# Altium PCB USB_CPLD.PcbDoc
Units mm, origin at the board's own origin, x right, y up, seen from the top; angles counter-clockwise.
Board outline 91.19 x 83.31 mm, 2 copper layers (Top Layer, Bottom Layer); 57 components, 142 nets, 491 pads, 153 vias.
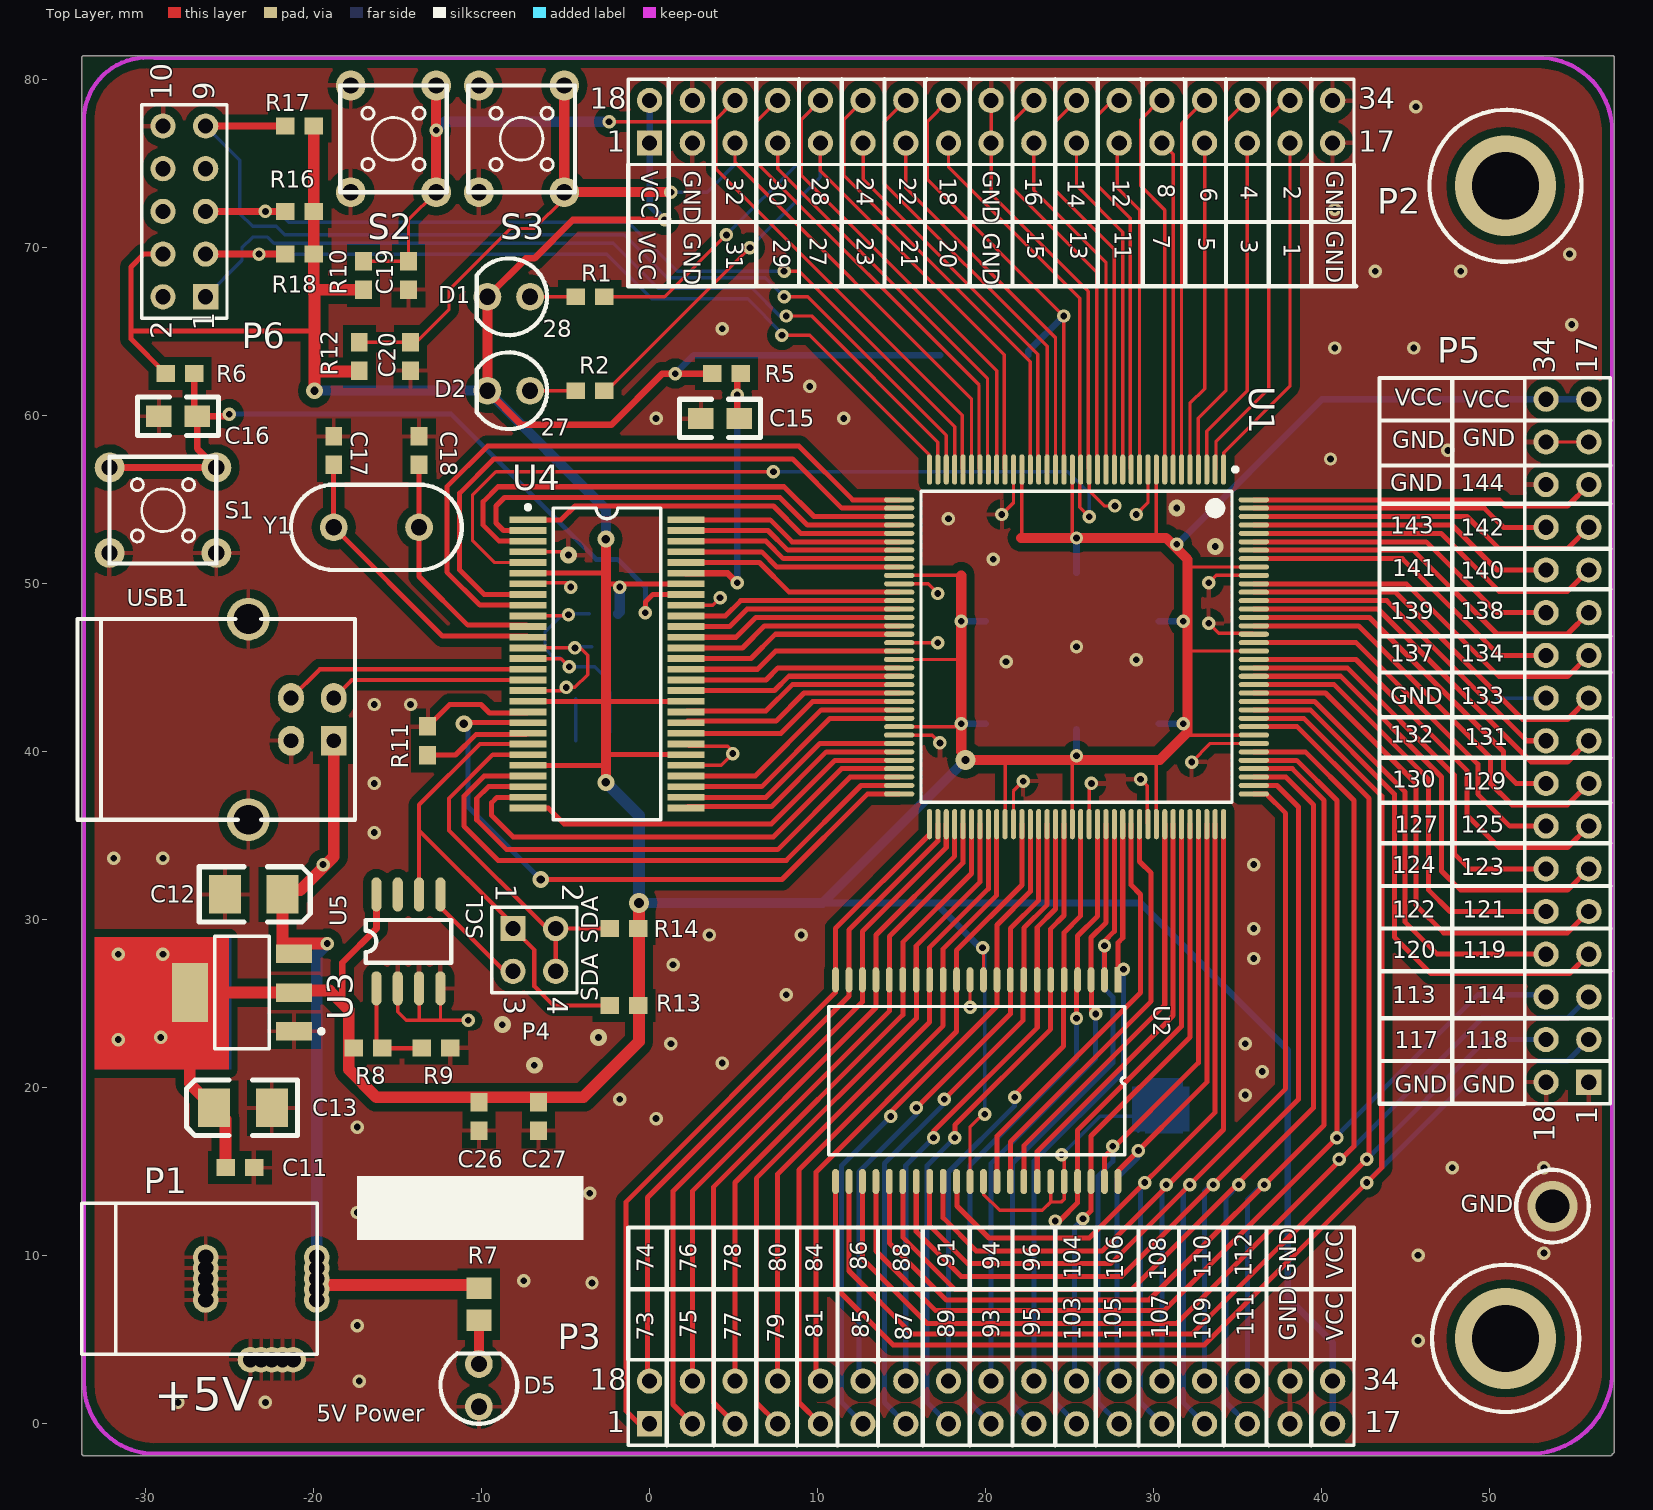
[diagram p0: Top Layer view]
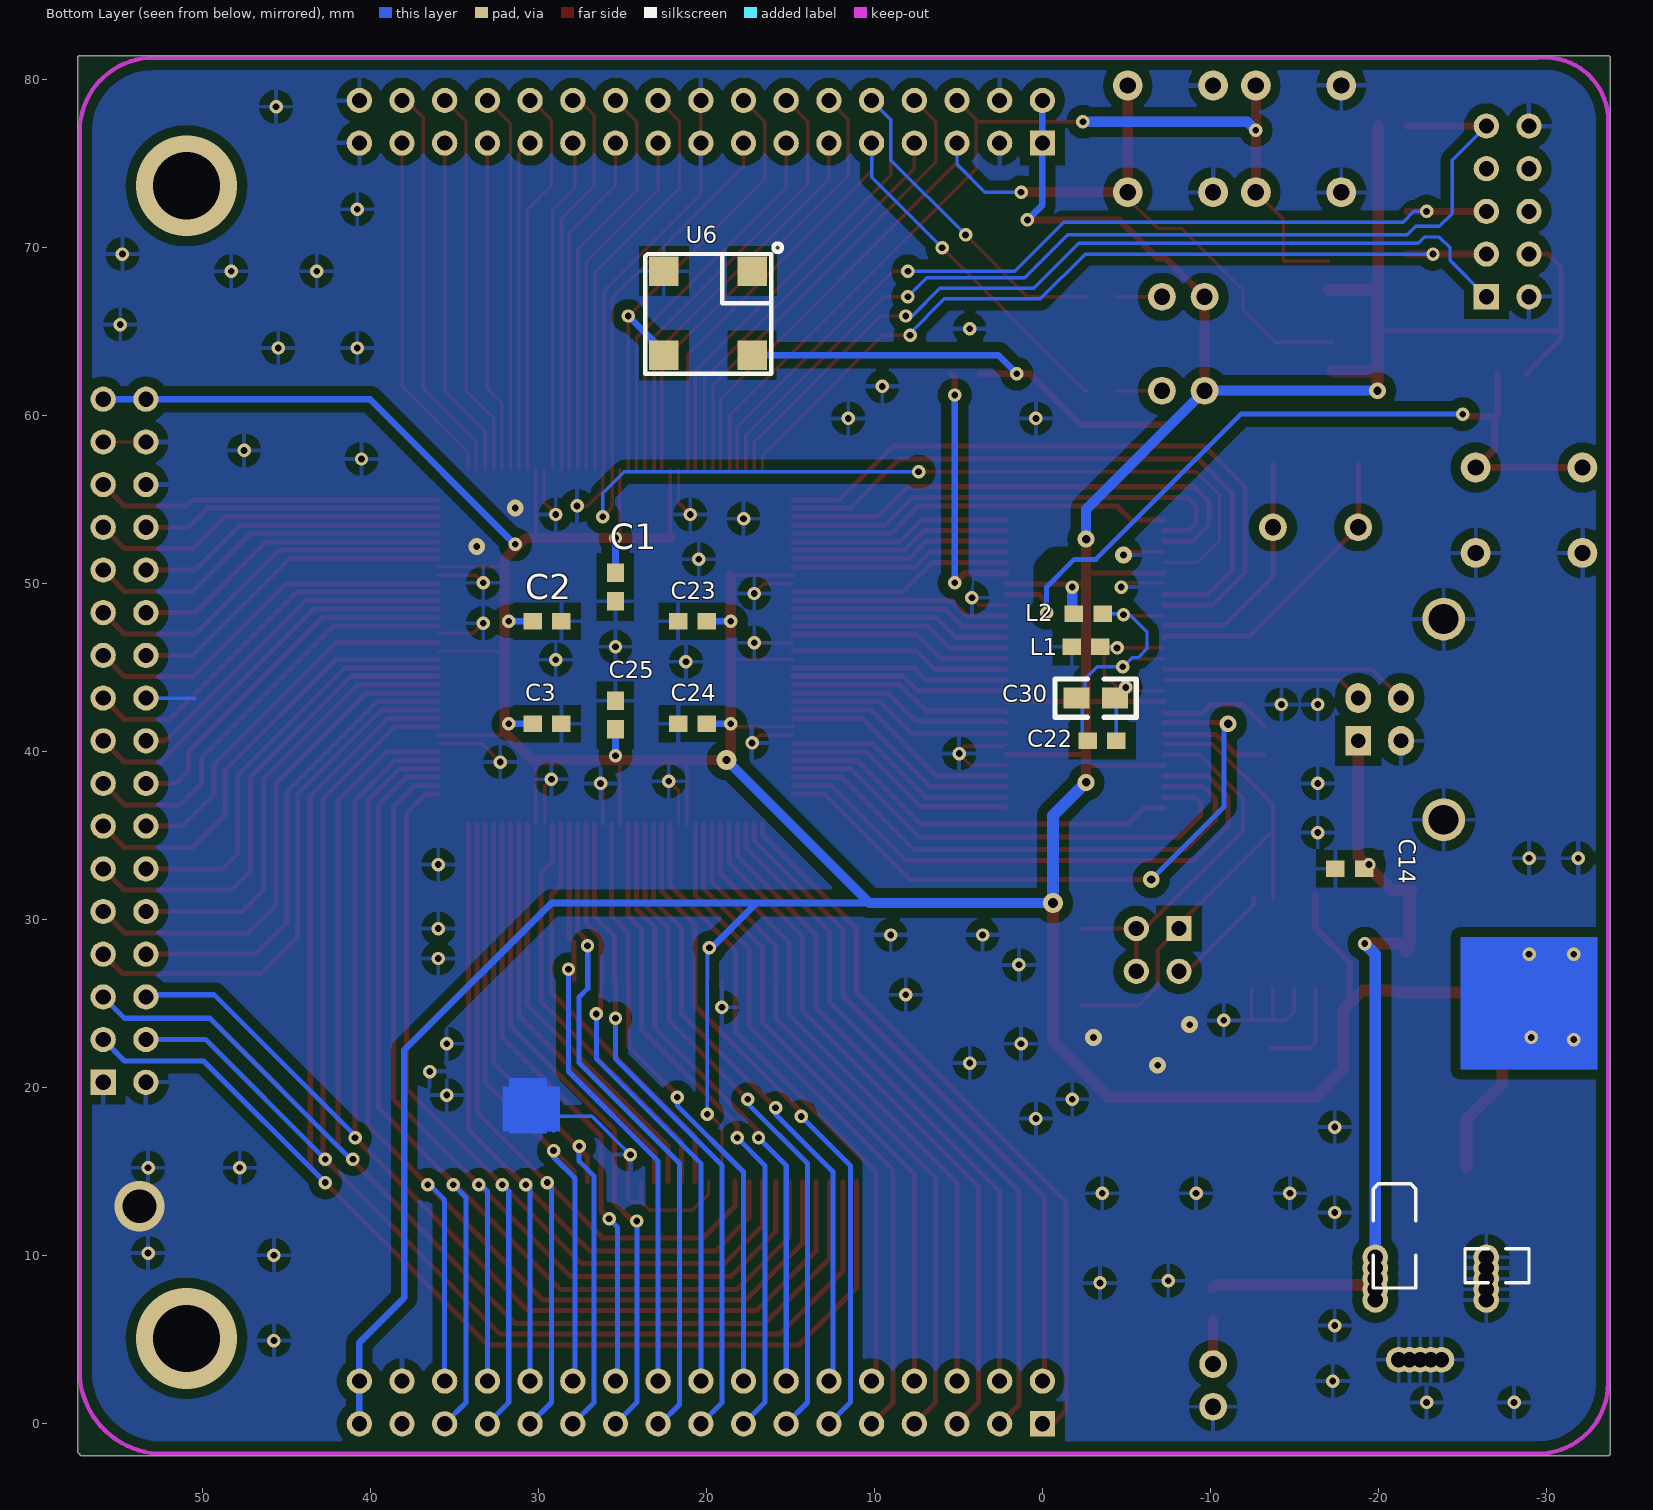
[diagram p1: Bottom Layer view, seen from below]

## Layer stack, top to bottom
Top Layer: signal copper 0.0356
Dielectric: dielectric 0.32, FR-4, Dk 4.8
Bottom Layer: signal copper 0.0356

## Board outline
-33.782,-1.778 ccw(c-33.655,-1.778) -33.655,-1.905 57.15,-1.905 ccw(c57.15,-1.778) 57.277,-1.778 ccw(c57.277,-1.651) 57.404,-1.651 57.404,81.28 ccw(c57.277,81.28) 57.277,81.407 -33.655,81.407 ccw(c-33.655,81.28) -33.782,81.28

## Design rules (kind name [scope] priority, off if disabled: settings)
Clearance [All] p1: gap=0.2
ComponentClearance [All] p1: gap=0.254 collisioncheckmode=3 verticalgap=0.254
PolygonConnect [All] p1: connectstyle=Relief reliefconductorwidth=0.254 reliefentries=4 polygonreliefangle="90 Angle"
RoutingVias [All] p1: holewidth=0.711 width=1.27 viastyle="Through Hole" minholewidth=0.711 minwidth=1.27 maxholewidth=0.711 maxwidth=1.27
SolderMaskExpansion [All] p1: expansion=0.102
TestPointUsage [All] p1: valid=0 allowmultiple=FALSE
Testpoint [All] p1: side=15 testpointundercomponent=TRUE minsize=1.016 maxsize=2.54 preferedsize=1.524 minholesize=0 maxholesize=1.016 preferedholesize=0.813 testpointgrid=0.025 style=1023 order=0-112345678
Width [All] p1: maxlimit=0.7 minlimit=0.2 preferedwidth=0.254
18 further rules are at their usual default settings.

## Components (designator, comment, footprint, x,y, rotation, side; value= is the part's Value field where it differs from the comment)
C1 "0.1uF" 1608[0603] 25.4,49.784 r90 bottom
C2 "0.1uF" 1608[0603] 29.464,47.752 r0 bottom
C3 "Cap Semi" 1608[0603] 29.464,41.656 r0 bottom
C11 "0.1uF" 1608[0603] -24.384,15.24 r0 top
C12 "22uF" 3528 -21.844,31.496 r0 top
C13 "22uF" 3528 -25.908,18.796 r180 top
C14 "0.1uF" 1608[0603] -18.288,33.02 r0 bottom
C15 "0.1uF" 0805 5.334,59.817 r180 top
C16 "0.1uF" 0805 -26.924,59.944 r180 top
C17 "Cap" 1608[0603] -18.796,57.912 r90 top
C18 "Cap" 1608[0603] -13.716,57.912 r90 top
C19 "104" 1608[0603] -14.351,68.326 r270 top
C20 "104" 1608[0603] -14.224,63.5 r270 top
C22 "0.1uF" 1608[0603] -3.556,40.64 r180 bottom
C23 "Cap Semi" 1608[0603] 20.828,47.752 r180 bottom
C24 "Cap Semi" 1608[0603] 20.828,41.656 r180 bottom
C25 "Cap Semi" 1608[0603] 25.4,42.164 r270 bottom
C26 "Cap Semi" 1608[0603] -10.16,18.288 r90 top
C27 "Cap Semi" 1608[0603] -6.604,18.288 r90 top
C30 "10uF" 0805 -2.032,43.18 r180 bottom
D1 "LED" LED-3 -7.112,67.056 r180 top
D2 "LED" LED-3 -7.112,61.468 r180 top
D5 "LED" LED-3 -10.16,1.016 r90 top
L1 "10uH" 1608[0603] -2.73,48.197 r180 bottom (schematic designator Ind1)
L2 "10uH" 1608[0603] -2.603,46.228 r180 bottom (schematic designator Ind2)
P1 "POWER" POWER_BIG -19.812,8.636 r90 top
P2 "Header 17X2A" HDR2X17_CEN 0,76.2 r0 top
P3 "Header 17X2A" HDR2X17_CEN 0,0 r0 top
P4 "Header 2X2" HDR2X2 -8.128,29.464 r270 top
P5 "Header 17X2A" HDR2X17_CEN 55.88,20.32 r90 top
P6 "JTAG" HDR2X5 -26.416,67.056 r90 top
R1 "Res1" 1608[0603] -3.556,67.056 r0 top
R2 "Res1" 1608[0603] -3.556,61.468 r0 top
R5 "10K" 1608[0603] 4.572,62.484 r180 top
R6 "10K" 1608[0603] -27.94,62.484 r180 top
R7 "1K" 2012[0805] -10.16,7.112 r90 top
R8 "0" 1608[0603] -16.764,22.352 r180 top
R9 "0" 1608[0603] -12.7,22.352 r0 top
R10 "10K" 1608[0603] -17.018,68.326 r270 top
R11 "Res3" 1608[0603] -13.208,40.64 r90 top
R12 "10K" 1608[0603] -17.272,63.5 r270 top
R13 "2K2" 1608[0603] -1.524,24.892 r180 top
R14 "2K2" 1608[0603] -1.524,29.464 r180 top
R16 "300" 1608[0603] -20.828,72.136 r0 top
R17 "300" 1608[0603] -20.828,77.216 r0 top
R18 "300" 1608[0603] -20.828,69.596 r0 top
S1 "SW-PB" SW-6-6 -28.956,54.356 r90 top
S2 "SW-PB" SW-6-6 -15.24,76.454 r180 top
S3 "SW-PB" SW-6-6 -7.62,76.454 r180 top
U1 "EPM1270T144C5N" TQFP144_N 25.4,46.228 r270 top
U2 "ISSI61LV25616-10T" TSOPII44 27.864,26.416 r270 top
U3 "ASM1117-3.3" SOT223 -24.257,25.654 r90 top
U4 "CY7C68013A-56PVXC" O56 -2.54,45.212 r270 top
U5 "24LC64" SO-8 -16.256,25.908 r90 top
U6 "50MHZ" OSC_50MHZ 17.272,68.58 r0 bottom
USB1 "USB_B" USB-SQUARE -18.796,40.64 r180 top
Y1 "24MHZ" XTAL -16.256,53.34 r0 top

## Footprints (in the part's own frame and the unit in brackets; to place one, negate y for a bottom-side part, rotate by r counter-clockwise, add the part's x,y. Pads: shape width x height; smd on the part's side, far side on the other; paste and mask are expansions set on the pad)
0805 [mil]
  rect 60x50 smd: 1(0,0) 2(90,0)
  silkscreen extent -50,-45 140,45
1608[0603] [mm] "Chip Capacitor; Body 1.6 x 0.8 mm (LxW typ)"
  rect 1.1x1 smd: 1(-0.85,0) 2(0.85,0)
2012[0805] [mm] "Chip Resistor; Body 2.0 x 1.3 mm (LxW typ)"
  rect 1.3x1.5 smd: 1(-0.95,0) 2(0.95,0)
3528 [mil]
  rect 75x90 smd: 1(0,0) 2(-135,0)
  silkscreen extent -195,-65 65,65
HDR2X2 [mm] "Connector; Header; 2x2 Position"
  rect 1.5x1.5 hole 0.9: 1(0,0)
  round 1.5 hole 0.9: 2(0,2.54) 3(2.54,0) 4(2.54,2.54)
  silkscreen extent -1.27,-1.27 3.81,3.81
HDR2X5 [mm] "Connector; Header; 5x2 Position"
  rect 1.5x1.5 hole 0.9: 1(0,0)
  round 1.5 hole 0.9: 2(0,2.54) 3(2.54,0) 4(2.54,2.54) 5(5.08,0) 6(5.08,2.54) 7(7.62,0) 8(7.62,2.54) 9(10.16,0) 10(10.16,2.54)
  silkscreen extent -1.27,-1.27 11.43,3.81
HDR2X17_CEN [mm] "Connector; Header; 17x2 Position"
  rect 1.5x1.5 hole 0.9: 1(0,0)
  round 1.5 hole 0.9: 2(2.54,0) 3(5.08,0) 4(7.62,0) 5(10.16,0) 6(12.7,0) 7(15.24,0) 8(17.78,0) 9(20.32,0) 10(22.86,0) 11(25.4,0) 12(27.94,0) 13(30.48,0) 14(33.02,0) 15(35.56,0) 16(38.1,0) 17(40.64,0) 18(0,2.54) 19(2.54,2.54) 20(5.08,2.54) 21(7.62,2.54) 22(10.16,2.54) 23(12.7,2.54) 24(15.24,2.54) 25(17.78,2.54) 26(20.32,2.54) 27(22.86,2.54) 28(25.4,2.54) 29(27.94,2.54) 30(30.48,2.54) 31(33.02,2.54) 32(35.56,2.54) 33(38.1,2.54) 34(40.64,2.54)
  silkscreen extent -1.27,-1.27 41.91,3.81
LED-3 [mil]
  round 65 hole 38: 1(0,0) 2(100,0)
  silkscreen extent -40,-90 125,90
O56 [mm] "SSOP; 56 Leads; Body Width 7.5 mm; Pitch 0.635 mm"
  rect 0.4x2.2 smd: 1(-8.572,-4.7) 2(-7.937,-4.7) 3(-7.302,-4.7) 4(-6.667,-4.7) 5(-6.032,-4.7) 6(-5.397,-4.7) 7(-4.762,-4.7) 8(-4.127,-4.7) 9(-3.492,-4.7) 10(-2.857,-4.7) 11(-2.222,-4.7) 12(-1.587,-4.7) 13(-0.952,-4.7) 14(-0.317,-4.7) 15(0.318,-4.7) 16(0.953,-4.7) 17(1.588,-4.7) 18(2.223,-4.7) 19(2.858,-4.7) 20(3.493,-4.7) 21(4.128,-4.7) 22(4.763,-4.7) 23(5.398,-4.7) 24(6.033,-4.7) 25(6.668,-4.7) 26(7.303,-4.7) 27(7.938,-4.7) 28(8.573,-4.7) 29(8.572,4.7) 30(7.937,4.7) 31(7.302,4.7) 32(6.667,4.7) 33(6.032,4.7) 34(5.397,4.7) 35(4.762,4.7) 36(4.127,4.7) 37(3.492,4.7) 38(2.857,4.7) 39(2.222,4.7) 40(1.587,4.7) 41(0.952,4.7) 42(0.317,4.7) 43(-0.318,4.7) 44(-0.953,4.7) 45(-1.588,4.7) 46(-2.223,4.7) 47(-2.858,4.7) 48(-3.493,4.7) 49(-4.128,4.7) 50(-4.763,4.7) 51(-5.398,4.7) 52(-6.033,4.7) 53(-6.668,4.7) 54(-7.303,4.7) 55(-7.938,4.7) 56(-8.573,4.7)
  silkscreen extent -9.45,-4.82 9.28,3.2
OSC_50MHZ [mm]
  rect 1.75x1.75 smd: 1(0,0) 2(5.25,0) 3(5.25,5) 4(0,5)
  silkscreen extent -1.78,-1.65 6.35,6.1
POWER_BIG [mil]
  round 60 hole 36: 1(-50,0) 1(-25,0) 1(0,0) 1(25,0) 1(50,0) 2(-50,260) 2(-25,260) 2(0,260) 2(25,260) 2(50,260) 3(-190,55) 3(-190,80) 3(-190,105) 3(-190,130) 3(-190,155)
  silkscreen extent -177,-1 177,550
SO-8 [mil]
  oval 80x24 smd: 1(0,0) 2(0,-50) 3(0,-100) 4(0,-150) 5(220,-150) 6(220,-100) 7(220,-50) 8(220,0)
  silkscreen extent 60,-175 160,25
SOT223 [mm] "SOT-223/SC-73; 4 Leads; Body 6.7 x 7.3 mm, inc. leads (LxW max)"
  rect 1.1x2.15 smd: 1(-2.3,-3.1) 2(0,-3.1) 3(2.3,-3.1)
  rect 3.5x2.15 smd: 4(0,3.1)
  silkscreen extent -3.35,-4.85 3.35,1.63
SW-6-6 [mil]
  round 70 hole 38: 1(-100,125) 1(-100,-125) 2(100,125) 2(100,-125)
  silkscreen extent -125,-125 125,125
TQFP144_N [mm] "Thin QFP, 144-Leads, Body 20x20mm, Pitch 0.5mm, IPC Medium Density"
  oval 1.8x0.3 smd: 1(-10.55,8.75) 2(-10.55,8.25) 3(-10.55,7.75) 4(-10.55,7.25) 5(-10.55,6.75) 6(-10.55,6.25) 7(-10.55,5.75) 8(-10.55,5.25) 9(-10.55,4.75) 10(-10.55,4.25) 11(-10.55,3.75) 12(-10.55,3.25) 13(-10.55,2.75) 14(-10.55,2.25) 15(-10.55,1.75) 16(-10.55,1.25) 17(-10.55,0.75) 18(-10.55,0.25) 19(-10.55,-0.25) 20(-10.55,-0.75) 21(-10.55,-1.25) 22(-10.55,-1.75) 23(-10.55,-2.25) 24(-10.55,-2.75) 25(-10.55,-3.25) 26(-10.55,-3.75) 27(-10.55,-4.25) 28(-10.55,-4.75) 29(-10.55,-5.25) 30(-10.55,-5.75) 31(-10.55,-6.25) 32(-10.55,-6.75) 33(-10.55,-7.25) 34(-10.55,-7.75) 35(-10.55,-8.25) 36(-10.55,-8.75) 73(10.55,-8.75) 74(10.55,-8.25) 75(10.55,-7.75) 76(10.55,-7.25) 77(10.55,-6.75) 78(10.55,-6.25) 79(10.55,-5.75) 80(10.55,-5.25) 81(10.55,-4.75) 82(10.55,-4.25) 83(10.55,-3.75) 84(10.55,-3.25) 85(10.55,-2.75) 86(10.55,-2.25) 87(10.55,-1.75) 88(10.55,-1.25) 89(10.55,-0.75) 90(10.55,-0.25) 91(10.55,0.25) 92(10.55,0.75) 93(10.55,1.25) 94(10.55,1.75) 95(10.55,2.25) 96(10.55,2.75) 97(10.55,3.25) 98(10.55,3.75) 99(10.55,4.25) 100(10.55,4.75) 101(10.55,5.25) 102(10.55,5.75) 103(10.55,6.25) 104(10.55,6.75) 105(10.55,7.25) 106(10.55,7.75) 107(10.55,8.25) 108(10.55,8.75)
  oval 0.3x1.8 smd: 37(-8.75,-10.55) 38(-8.25,-10.55) 39(-7.75,-10.55) 40(-7.25,-10.55) 41(-6.75,-10.55) 42(-6.25,-10.55) 43(-5.75,-10.55) 44(-5.25,-10.55) 45(-4.75,-10.55) 46(-4.25,-10.55) 47(-3.75,-10.55) 48(-3.25,-10.55) 49(-2.75,-10.55) 50(-2.25,-10.55) 51(-1.75,-10.55) 52(-1.25,-10.55) 53(-0.75,-10.55) 54(-0.25,-10.55) 55(0.25,-10.55) 56(0.75,-10.55) 57(1.25,-10.55) 58(1.75,-10.55) 59(2.25,-10.55) 60(2.75,-10.55) 61(3.25,-10.55) 62(3.75,-10.55) 63(4.25,-10.55) 64(4.75,-10.55) 65(5.25,-10.55) 66(5.75,-10.55) 67(6.25,-10.55) 68(6.75,-10.55) 69(7.25,-10.55) 70(7.75,-10.55) 71(8.25,-10.55) 72(8.75,-10.55) 109(8.75,10.55) 110(8.25,10.55) 111(7.75,10.55) 112(7.25,10.55) 113(6.75,10.55) 114(6.25,10.55) 115(5.75,10.55) 116(5.25,10.55) 117(4.75,10.55) 118(4.25,10.55) 119(3.75,10.55) 120(3.25,10.55) 121(2.75,10.55) 122(2.25,10.55) 123(1.75,10.55) 124(1.25,10.55) 125(0.75,10.55) 126(0.25,10.55) 127(-0.25,10.55) 128(-0.75,10.55) 129(-1.25,10.55) 130(-1.75,10.55) 131(-2.25,10.55) 132(-2.75,10.55) 133(-3.25,10.55) 134(-3.75,10.55) 135(-4.25,10.55) 136(-4.75,10.55) 137(-5.25,10.55) 138(-5.75,10.55) 139(-6.25,10.55) 140(-6.75,10.55) 141(-7.25,10.55) 142(-7.75,10.55) 143(-8.25,10.55) 144(-8.75,10.55)
  silkscreen extent -10.67,-9.25 9.25,9.58, body extent -10,-10 10,10, height 1.6
TSOPII44 [mm]
  rect 1.5x0.4 smd: 1(0,0)
  oval 1.5x0.4 smd: 2(0,-0.8) 3(0,-1.6) 4(0,-2.4) 5(0,-3.2) 6(0,-4) 7(0,-4.8) 8(0,-5.6) 9(0,-6.4) 10(0,-7.2) 11(0,-8) 12(0,-8.8) 13(0,-9.6) 14(0,-10.4) 15(0,-11.2) 16(0,-12) 17(0,-12.8) 18(0,-13.6) 19(0,-14.4) 20(0,-15.2) 21(0,-16) 22(0,-16.8) 23(12,-16.8) 24(12,-16) 25(12,-15.2) 26(12,-14.4) 27(12,-13.6) 28(12,-12.8) 29(12,-12) 30(12,-11.2) 31(12,-10.4) 32(12,-9.6) 33(12,-8.8) 34(12,-8) 35(12,-7.2) 36(12,-6.4) 37(12,-5.6) 38(12,-4.8) 39(12,-4) 40(12,-3.2) 41(12,-2.4) 42(12,-1.6) 43(12,-0.8) 44(12,0)
  silkscreen extent 1.58,-17.2 10.42,0.4
USB-SQUARE [mil]
  round 100 hole 70: 0(200,185) 0(200,-285)
  rect 60x70 hole 35: 1(0,0)
  oval 60x70 hole 35: 2(0,-100) 3(100,-100) 4(100,0)
  silkscreen extent -50,-285 600,185
XTAL [mil]
  round 65 hole 38: 1(-100,0) 2(100,0)
  silkscreen extent -200,-100 200,100

## Part data
C1 C2 C19 C20: library part "Cap Semi", "Capacitor (Semiconductor SIM Model)"
C3 C23 C24 C25 C26 C27: "Capacitor (Semiconductor SIM Model)"
C11 C14 C22: library part CAP, "Capacitor"
C12 C13 C30: library part ELECTRO1, "Electrolytic Capacitor"
C15 C16: library part Cap2, "Capacitor"
C17 C18: "Capacitor"
D1 D2 D5: library part LED3, "Typical BLUE SiC LED"
L1 L2: library part RES1
P2 P3 P5: "Header, 17-Pin, Dual row"
P4: "Header, 2-Pin, Dual row"
P6: library part "Header 5X2", "Header, 5-Pin, Dual row"
R1 R2 R11: "Resistor"
R5 R6 R10 R12: library part Res1, "Resistor"
R7 R13 R14: library part RES2
R8 R9 R16 R17 R18: library part Res2, "Resistor"
S1 S2 S3: "Switch"
U1: "MAX II 3.3/2.5V CPLD, 116 IOs, 1,270 Logic Elements, 144-Pin Plastic TQFP, Commercial Temperature, Speed Grade 5, Pb-Free"
U2: library part IS61LV25616-10T, "IS61LV25616-10T  10ns Speed"
U3: library part LM317MAT(3), "Three-Terminal Adjustable Output Positive Voltage Regulator"
U4: "EZ-USB FX2LP USB Microcontroller Ideal for Non-Battery Powered Applications,16K RAM, 24 I/Os, 56-Pin SSOP, Pb-Free, Commercial Grade"
U5: library part 24LC00
U6: library part OSC50MHZ
Y1: library part XTAL, "Crystal Oscillator"

## Via types
v1: diameter 0.8, hole 0.4, Top Layer to Bottom Layer, 137 vias
v2: diameter 1, hole 0.4, Top Layer to Bottom Layer, 6 vias
v3: diameter 1, hole 0.5, Top Layer to Bottom Layer, 5 vias
v4: diameter 6, hole 4, Top Layer to Bottom Layer, 2 vias
v5: diameter 1.2, hole 0.5, Top Layer to Bottom Layer, 1 vias
v6: diameter 1.2, hole 0.6, Top Layer to Bottom Layer, 1 vias
v7: diameter 3, hole 2, Top Layer to Bottom Layer, 1 vias

## Nets (pads, with @x,y where several pads share a name; then routed paths per layer and width w, separated by ;. In a path a pad name is that pad's centre, name@x,y a point inside that pad or via, vN(x,y) a via of type N, cw(c..) or ccw(c..) an arc to the next point about the centre after c; other vN are vias at no path point)
AUSBGND: C22.2 C30.2 L2.2 U4.13 U4.17 | length 12.4
  Top Layer w0.2: U4.17 -5.143,43.624 v1(-4.953,43.815) -4.445,43.815 -3.683,44.577 -3.683,45.72 -4.127,46.164 U4.13
  Bottom Layer w0.2: v1(-4.445,46.164) -4.381,46.228 L2.2 ; C22.2 C30.2@-4.406,43.141
AVCC3.3: C22.1 C30.1 L1.2 U4.10 U4.14 | length 16.9
  Top Layer w0.2: U4.14 -5.271,45.529 v1(-4.779,45.038) ; U4.10 -4.889,48.069 v1(-4.826,48.133)
  Bottom Layer w0.2: L1.2 -4.763,48.197 v1(-4.826,48.133) -5.207,48.133 -6.223,47.117 -6.223,46.101 -5.715,45.593 -5.334,45.593 v1(-4.779,45.038) -3.255,45.038 -2.54,44.323 -2.54,43.688 -2.374,43.522 -2.374,41.148
CLK_OUT: P2.8 U1.18 U4.5 | length 71.5
  Top Layer w0.2: U4.5 -9.207,51.244 -10.541,52.578 -10.541,55.245 -9.144,56.642 v1(7.366,56.642) ; P2.8 17.78,74.803 25.6,66.983 25.6,54.537 v1(26.162,53.975) ; U1.18@25.6,56.828 U1.18
  Bottom Layer w0.2: v1(7.366,56.642) 24.892,56.642 26.162,55.372 v1(26.162,53.975)
CPLD_CLK: P2.25 U1.20 U6.3 | length 29.1
  Top Layer w0.2: P2.25 16.51,77.47 16.51,74.041 24.65,65.901 U1.20
  Bottom Layer w0.4: U6.3 22.522,63.797 v1(24.638,65.913)
CTL0: U1.61 U4.36 | length 13.5
  Top Layer w0.3: U4.36 7.81,41.084 9.704,42.978 U1.61
CTL1: U1.60 U4.37 | length 13.4
  Top Layer w0.3: U4.37 2.245,41.805 7.515,41.805 9.188,43.478 U1.60
CTL2: U1.59 U4.38 | length 13.4
  Top Layer w0.3: U4.38 2.224,42.418 6.93,42.418 8.49,43.978 U1.59
DGND: C1.1 C2.1 C3.1 C11.2 C12.2 C13.2 C14.2 C15.2 C16.2 C17.2 C18.2 C19.2 C20.2 C23.1 C24.1 C25.1 C26.1 C27.1 D5.1 L2.1 P1.2 P1.3 P2.2 P2.9 P2.17 P2.19 P2.26 P2.34 P3.16 P3.33 P5.1 P5.16 P5.18 P5.27 P5.32 P5.33 P6.2 P6.10 R9.2 R11.2 S1.1 S2.2 S3.2 U1.10 U1.17 U1.26 U1.47 U1.54 U1.65 U1.83 U1.92 U1.99 U1.115 U1.128 U1.135 U2.12 U2.34 U2.39 U2.40 U3.1 U4.4 U4.7 U4.19 U4.33 U4.35 U4.48 U5.2 U5.3 U5.4 U6.2 USB1.0 USB1.4 | length 116.3
  Top Layer w0.2: U5.2 -14.986,24.511 -14.478,24.003 v1@-10.541,24.003 ; -13.716,24.003 U5.3 ; -12.446,24.003 U5.4 ; U4.7 -7.177,50.038 -4.953,50.038 v1(-4.699,49.784) ; U4.4 v2@-5.016,51.88 ; U4.33 4.255,39.179 v1(4.953,39.878) 4.953,40.005 4.644,40.314 2.295,40.314 U4.35 ; U4.48 3.746,48.704 v1(4.191,49.149) ; U1.65 16.807,40.978 v1(17.272,40.513) ; U1.54 v1(17.141,46.478) ; U1.47 16.57,49.978 v1(17.145,49.403) ; v1(19.064,24.779) U2.12 ; U2.34 19.864,13.664 20.828,12.7 23.368,12.7 23.864,13.196 ; P2.26 20.32,73.152 26.1,67.372 26.1,56.828 U1.17 26.15,55.511 27.051,54.61 v1(27.686,54.61) ; v1(20.955,54.102) 21.65,54.797 U1.26 ; U1.83 21.65,37.652 v1(22.225,38.227) ; U2.39 23.864,13.196 ; v1(24.511,16.002) 24.664,15.849 24.664,13.361 24.499,13.196 23.864,13.196 ; U1.92 26.15,37.961 v1(26.289,38.1) ; v1(28.956,54.102) 29.65,54.796 U1.10 ; v1(29.21,38.354) 29.6,37.964 29.6,35.728 U1.99 ; v1(32.258,39.37) 33.366,40.478 U1.115 ; v1(33.274,47.625) 33.871,47.028 35.9,47.028 U1.128 ; v1(33.274,50.038) 33.714,50.478 U1.135 ; P5.33 P5.16
  Top Layer w0.3: R11.2 -11.899,42.799 -10.033,42.799 -9.525,42.291 -7.304,42.291 U4.19
  Bottom Layer w0.2: v1(24.511,16.002) 26.797,18.288 30.861,18.288 ; 29.083,17.399 29.083,18.669 29.845,19.431 30.353,19.431 ; 50.419,43.18 P5.27
  other v1: -28.067,1.27 -22.86,1.27 -17.272,2.54 45.72,4.953 -17.399,5.842 -3.429,8.382 -7.493,8.509 45.72,10.033 53.213,10.16 -17.399,12.573 -14.732,13.716 -9.144,13.716 -3.556,13.716 47.752,15.24 53.213,15.24 -17.399,17.653 0.381,18.161 -1.778,19.304 35.433,19.558 36.449,20.955 4.318,21.463 1.27,22.606 35.433,22.606 -10.795,24.003 8.128,25.527 1.397,27.305 35.941,27.686 3.556,29.083 9.017,29.083 35.941,29.464 35.941,33.274 -31.877,33.655 -28.956,33.655 -16.383,35.179 -16.383,38.1 -16.383,42.799 -14.224,42.799 21.209,45.339 28.956,45.466 25.4,46.228 20.447,51.435 17.78,53.848 40.513,57.404 47.498,57.912 0.381,59.817 11.557,59.817 9.525,61.722 40.767,64.008 45.466,64.008 4.318,65.151 54.864,65.405 43.18,68.58 48.26,68.58 54.737,69.596 40.767,72.263 45.593,78.359
  other v2: -6.858,21.336 -3.048,22.987 -8.763,23.749 -4.826,51.689 33.655,52.197 31.369,54.483
  other v7: 53.721,12.954
G_TCK: P6.1 U1.35 | length 52.2
  Top Layer w0.2: v1(8.128,65.913) 9.652,65.913 17.15,58.415 U1.35
  Bottom Layer w0.2: P6.1 -24.257,69.215 -24.257,69.977 -23.622,70.612 -22.733,70.612 -22.352,70.231 -2.159,70.231 0.508,67.564 6.096,67.564 7.747,65.913 v1(8.128,65.913)
G_TDI: P6.9 R17.1 U1.34 | length 60.3
  Top Layer w0.2: v1(8.001,67.056) 9.398,67.056 17.65,58.804 U1.34
  Top Layer w0.4: P6.9 R17.1
  Bottom Layer w0.2: P6.9 -24.384,75.184 -24.384,72.009 -23.622,71.247 -22.225,71.247 -21.717,70.739 -1.524,70.739 1.035,68.18 6.877,68.18 v1(8.001,67.056)
G_TDO: P6.3 R18.1 U1.36 | length 50.3
  Top Layer w0.2: v1@8.128,64.77 9.525,64.77 16.65,57.645 U1.36
  Top Layer w0.4: P6.3 R18.1
  Bottom Layer w0.2: v1(-23.241,69.596) -2.54,69.596 0.127,66.929 5.842,66.929 7.874,64.897 v1(7.874,64.77)
G_TMS: P6.5 R16.1 U1.33 | length 53.6
  Top Layer w0.2: v1(8.001,68.58) 8.89,68.58 18.15,59.32 U1.33
  Top Layer w0.4: P6.5 R16.1
  Bottom Layer w0.2: v1(-22.86,72.136) -22.098,72.136 -21.463,71.501 -1.27,71.501 1.651,68.58 v1(8.001,68.58)
GND: 
IFCLK: U1.72 U4.20 | length 38.4
  Top Layer w0.3: v3@-11.049,41.719 U4.20 ; v3(-6.477,32.385) 7.874,32.385 12.954,37.465 14.837,37.465 U1.72
  Bottom Layer w0.3: v3(-11.049,41.656) -10.795,41.402 -10.795,36.703 v3(-6.477,32.385)
NetC17_1: C17.1 U4.12 Y1.1 | length 18.4
  Top Layer w0.3: Y1.1@-18.986,53.149 Y1.1@-18.605,53.149 ; C17.1 Y1.1 -12.319,46.863 -7.304,46.863 U4.12
NetC18_1: C18.1 U4.11 Y1.2 | length 14.4
  Top Layer w0.3: C18.1 -13.716,50.419 -10.817,47.52 -7.325,47.52 U4.11
NetD1_1: D1.1 R1.1 | length 2.7
  Top Layer w0.2: D1.1 R1.1
NetD2_1: D2.1 R2.1 | length 2.7
  Top Layer w0.2: D2.1 R2.1
NetD3_1: 
NetD4_1: 
NetD5_2: D5.2 R7.1 | length 2.6
  Top Layer w0.6: D5.2 R7.1
NetR8_1: R8.1 R9.1 U5.1 | length 6.1
  Top Layer w0.254: U5.1 -16.256,22.694 R8.1 R9.1
NetR11_1: R11.1 U4.21 | length 6.5
  Top Layer w0.3: R11.1 -11.553,39.79 -10.343,40.999 -7.325,40.999 U4.21
PA0: U1.58 U4.40 | length 13
  Top Layer w0.3: U4.40 7.429,43.624 8.283,44.478 U1.58
PA1: U1.57 U4.41 | length 13
  Top Layer w0.3: U4.41 6.921,44.259 7.64,44.978 U1.57
PA2: U1.55 U4.42 | length 13.1
  Top Layer w0.3: U4.42 6.413,44.895 7.497,45.978 U1.55
PA3: U1.53 U4.43 | length 13.3
  Top Layer w0.3: U4.43 6.032,45.529 7.481,46.978 U1.53
PA4: U1.52 U4.44 | length 13.2
  Top Layer w0.3: U4.44 5.524,46.164 6.838,47.478 U1.52
PA5: U1.51 U4.45 | length 13.2
  Top Layer w0.3: U4.45 5.143,46.799 6.322,47.978 U1.51
PA6: U1.50 U4.46 | length 13.1
  Top Layer w0.3: U4.46 4.763,47.434 5.806,48.478 U1.50
PA7: U1.49 U4.47 | length 13.1
  Top Layer w0.3: U4.47 4.508,48.069 5.417,48.978 U1.49
PB0: U1.71 U4.25 | length 34.7
  Top Layer w0.3: U4.25 -9.842,38.544 -11.049,37.338 -11.049,35.56 -9.017,33.528 8.128,33.528 12.578,37.978 U1.71
PB1: U1.70 U4.26 | length 32.3
  Top Layer w0.3: U4.26 -9.588,37.91 -10.287,37.211 -10.287,35.941 -8.509,34.163 7.62,34.163 11.935,38.478 U1.70
PB2: U1.69 U4.27 | length 29.5
  Top Layer w0.3: U4.27 -9.08,37.274 -9.398,36.957 -9.398,36.195 -8.128,34.925 7.366,34.925 11.419,38.978 U1.69
PB3: U1.68 U4.28 | length 24.1
  Top Layer w0.3: U4.28 -6.032,36.639 -5.08,35.687 7.239,35.687 11.03,39.478 U1.68
PB4: U1.67 U4.29 | length 14.1
  Top Layer w0.3: U4.29 2.245,36.725 7.261,36.725 10.514,39.978 U1.67
PB5: U1.66 U4.30 | length 14
  Top Layer w0.3: U4.30 6.921,37.274 10.125,40.478 U1.66
PB6: U1.63 U4.31 | length 14.4
  Top Layer w0.3: U4.31 6.667,37.91 10.736,41.978 U1.63
PB7: U1.62 U4.32 | length 14.3
  Top Layer w0.3: U4.32 6.286,38.544 10.22,42.478 U1.62
PD0: U1.48 U4.52 | length 13.4
  Top Layer w0.3: U4.52 6.54,51.244 8.307,49.478 U1.48
PD1: U1.45 U4.53 | length 13.1
  Top Layer w0.3: U4.53 6.667,51.88 7.569,50.978 U1.45
PD2: U1.44 U4.54 | length 13.1
  Top Layer w0.3: U4.54 6.921,52.514 7.958,51.478 U1.44
PD3: U1.43 U4.55 | length 13.2
  Top Layer w0.3: U4.55 7.048,53.149 8.22,51.978 U1.43
PD4: U1.42 U4.56 | length 13.2
  Top Layer w0.3: U4.56 7.175,53.785 8.482,52.478 U1.42
PD5: U1.41 U4.1 | length 23.1
  Top Layer w0.3: U4.1 -5.271,53.785 -4.445,54.61 7.366,54.61 8.998,52.978 U1.41
PD6: U1.40 U4.2 | length 28
  Top Layer w0.3: U4.2 -8.7,53.149 -9.144,53.594 -9.144,54.61 -8.636,55.118 7.747,55.118 9.387,53.478 U1.40
PD7: U1.39 U4.3 | length 30.3
  Top Layer w0.3: U4.3 -8.954,52.514 -9.906,53.467 -9.906,54.864 -9.017,55.753 8.001,55.753 9.776,53.978 U1.39
PORT1: P2.16 U1.1 | length 21.1
  Top Layer w0.2: U1.1 34.15,57.772 38.1,61.722 P2.16
PORT2: P2.33 U1.2 | length 24
  Top Layer w0.2: U1.2 33.7,56.828 33.7,58.465 36.83,61.595 36.83,77.724 37.846,78.74 P2.33
PORT3: P2.15 U1.3 | length 20.4
  Top Layer w0.2: U1.3 33.15,59.058 35.56,61.468 P2.15
PORT4: P2.32 U1.4 | length 23.2
  Top Layer w0.2: U1.4 32.65,59.828 34.29,61.468 34.29,77.47 P2.32
PORT5: P2.14 U1.5 | length 19.8
  Top Layer w0.2: U1.5 32.15,60.725 33.02,61.595 P2.14
PORT6: P2.31 U1.6 | length 22.5
  Top Layer w0.2: U1.6 31.65,77.37 P2.31
PORT7: P2.13 U1.7 | length 19.7
  Top Layer w0.2: P2.13 31.15,75.53 U1.7
PORT8: P2.30 U1.8 | length 23.2
  Top Layer w0.2: P2.30 30.353,78.74 29.21,77.597 29.21,73.66 30.65,72.22 U1.8
PORT11: P2.12 U1.11 | length 20
  Top Layer w0.2: P2.12 27.813,76.073 27.813,73.533 29.15,72.196 U1.11
PORT12: P2.29 U1.12 | length 23.5
  Top Layer w0.2: P2.29 27.559,78.74 26.67,77.851 26.67,73.66 28.6,71.73 28.6,56.828 U1.12
PORT13: P2.11 U1.13 | length 20.6
  Top Layer w0.2: P2.11 25.4,73.66 28.15,70.91 U1.13
PORT14: P2.28 U1.14 | length 23.9
  Top Layer w0.2: P2.28 24.13,77.47 24.13,73.406 27.65,69.886 U1.14
PORT15: P2.10 U1.15 | length 21.2
  Top Layer w0.2: P2.10 22.86,73.406 27.15,69.116 U1.15
PORT16: P2.27 U1.16 | length 24.6
  Top Layer w0.2: P2.27 21.59,77.47 21.59,73.533 26.6,68.523 26.6,56.828 U1.16
PORT21: P2.7 U1.21 | length 23.1
  Top Layer w0.2: P2.7 15.24,73.533 24.15,64.623 U1.21
PORT22: P2.24 U1.22 | length 26.5
  Top Layer w0.2: P2.24 13.97,77.47 13.97,73.787 23.65,64.107 U1.22
PORT23: P2.6 U1.23 | length 23.8
  Top Layer w0.2: P2.6 12.7,74.041 23.1,63.641 23.1,56.828 U1.23
PORT24: P2.23 U1.24 | length 26.9
  Top Layer w0.2: P2.23@12.446,78.74 12.446,78.486 11.557,77.597 11.557,74.295 22.65,63.202 U1.24
PORT27: P2.5 R2.2 U1.27 | length 44.1
  Top Layer w0.2: R2.2 -2.54,61.468 v1(5.969,69.977) ; P2.5 10.16,74.549 21.1,63.609 21.1,56.828 U1.27
  Bottom Layer w0.2: v1(5.969,69.977) 10.16,74.168 P2.5
PORT28: P2.22 R1.2 U1.28 | length 46.4
  Top Layer w0.2: R1.2 0.889,67.056 v1(4.572,70.739) ; P2.22 9.017,77.597 9.017,74.295 20.65,62.662 U1.28
  Bottom Layer w0.2: v1(4.572,70.739) 9.017,75.184 9.017,77.597 P2.22
PORT29: P2.4 U1.29 | length 24.6
  Top Layer w0.2: P2.4 7.62,74.676 20.1,62.196 20.1,56.828 U1.29
PORT30: P2.21 U1.30 | length 28
  Top Layer w0.2: P2.21 6.35,77.47 6.35,75.057 19.6,61.807 19.6,56.828 U1.30
PORT31: C20.1 P2.3 R12.1 S3.1 U1.31 | length 60.5
  Top Layer w0.2: R12.1 -13.882,64.35 -11.938,66.294 -11.938,67.437 -8.255,71.12 -6.858,71.12 -5.08,72.898 S3.1@-5.08,73.279 ; P2.3 5.08,75.057 19.15,60.987 U1.31
  Top Layer w0.6: S3.1@-5.08,79.629 -5.08,73.279 v1(1.27,73.279)
  Bottom Layer w0.2: v1(1.27,73.279) 3.429,73.279 5.08,74.93 P2.3
PORT32: C19.1 P2.20 R10.1 S2.1 U1.32 | length 59.2
  Top Layer w0.2: R10.1 C19.1 -14.351,71.628 S2.1@-12.7,73.279 ; v1(-2.413,77.47) 3.81,77.47 P2.20 ; 3.937,77.597 3.937,74.676 18.6,60.013 18.6,56.828 U1.32
  Top Layer w0.6: S2.1@-12.7,73.279 S2.1@-12.7,79.629
  Bottom Layer w0.6: v1(-12.7,76.962) -12.192,77.47 v1(-2.413,77.47)
PORT73: P3.1 U1.73 U2.22 | length 44.1
  Top Layer w0.3: P3.1 -0.635,0 -1.397,0.762 -1.397,13.208 11.064,25.669 11.064,29.479 16.65,35.065 U1.73
PORT74: P3.18 U1.74 U2.21 | length 40.3
  Top Layer w0.3: P3.18@-0.127,2.54 -0.127,13.462 11.864,25.453 11.864,29.39 17.15,34.676 U1.74
PORT75: P3.2 U1.75 U2.20 | length 42.9
  Top Layer w0.3: P3.2 1.397,1.143 1.397,13.843 12.664,25.11 12.664,29.301 17.65,34.287 U1.75
PORT76: P3.19 U1.76 U2.19 | length 39.6
  Top Layer w0.3: P3.19 2.54,13.843 13.464,24.767 13.464,29.085 18.15,33.771 U1.76
PORT77: P3.3 U1.77 U2.18 | length 42.4
  Top Layer w0.3: P3.3 3.81,1.27 3.81,14.097 14.264,24.551 14.264,28.996 18.65,33.382 U1.77
PORT78: P3.20 U1.78 U2.17 | length 39
  Top Layer w0.3: P3.20 5.08,14.351 15.064,24.335 15.064,28.653 19.15,32.739 U1.78
PORT79: P3.4 U1.79 U2.16 | length 41.6
  Top Layer w0.3: P3.4 6.35,1.27 6.35,14.605 15.875,24.13 15.875,26.405 U2.16 ; U2.16@15.864,26.543 15.864,28.437 19.65,32.223 U1.79
PORT80: P3.21 U1.80 U2.15 | length 38.3
  Top Layer w0.3: P3.21 7.62,14.859 16.664,23.903 16.664,28.348 20.15,31.834 U1.80
PORT81: P3.5 U1.81 U2.14 | length 41.1
  Top Layer w0.3: P3.5 8.89,1.27 8.89,15.113 17.464,23.687 17.464,28.259 20.65,31.445 U1.81
PORT84: P3.22 U1.84 U2.13 | length 38.3
  Top Layer w0.3: P3.22 9.906,2.794 9.906,14.986 18.264,23.344 18.264,28.17 22.15,32.056 U1.84
PORT85: P3.6 U1.85 U2.10 | length 40.9
  Top Layer w0.3: v1@14.414,18.224 14.414,18.605 20.664,24.855 20.664,29.681 22.65,31.667 U1.85
  Bottom Layer w0.3: P3.6 11.43,1.27 11.43,15.367 v1(14.351,18.288)
PORT86: P3.23 U1.86 U2.9 | length 37.7
  Top Layer w0.3: v1(15.875,18.796) 21.464,24.385 21.464,29.465 23.15,31.151 U1.86
  Bottom Layer w0.3: P3.23 12.446,2.794 12.446,14.986 15.875,18.415 v1(15.875,18.796)
PORT87: P3.7 U1.87 U2.8 | length 40.2
  Top Layer w0.3: v1(17.526,19.304) 22.225,24.003 22.225,26.377 U2.8 22.264,29.503 23.65,30.889 U1.87
  Bottom Layer w0.3: P3.7 13.97,1.27 13.97,15.494 17.526,19.05 v1(17.526,19.304)
PORT88: P3.24 U1.88 U2.7 | length 36.8
  Top Layer w0.3: v1(16.891,17.018) 16.891,17.399 23.064,23.572 23.064,29.541 24.15,30.627 U1.88
  Bottom Layer w0.3: P3.24 15.24,15.367 v1(16.891,17.018)
PORT89: P3.8 U1.89 U2.6 | length 39.6
  Top Layer w0.3: v1(18.161,17.018) 18.161,17.78 23.864,23.483 23.864,29.452 24.65,30.238 U1.89
  Bottom Layer w0.3: P3.8 16.51,1.27 16.51,15.367 v1(18.161,17.018)
PORT91: P3.25 U1.91 U2.5 | length 36.4
  Top Layer w0.3: v1@21.653,19.494 24.638,22.479 24.638,26.39 U2.5 24.664,29.236 25.65,30.222 U1.91
  Bottom Layer w0.3: P3.25 17.78,14.986 21.717,18.923 v1(21.717,19.431)
PORT93: P3.9 U1.93 U2.4 | length 39.6
  Top Layer w0.3: v1(25.4,24.13) 25.4,26.352 U2.4 25.464,29.02 26.65,30.206 U1.93
  Bottom Layer w0.3: P3.9@20.574,0 P3.9 19.05,1.27 19.05,15.367 25.4,21.717 v1(25.4,24.13)
PORT94: P3.26 U1.94 U2.3 | length 36.1
  Top Layer w0.3: v1@26.289,24.384 26.289,26.162 26.264,26.187 26.264,28.931 27.15,29.817 U1.94
  Bottom Layer w0.3: P3.26 20.32,15.494 26.543,21.717 v1(26.543,24.384)
PORT95: P3.10 U1.95 U2.2 | length 41.2
  Top Layer w0.3: U2.2 27.064,28.715 27.65,29.301 U1.95
  Bottom Layer w0.3: P3.10 22.733,0 21.59,1.143 21.59,15.494 27.559,21.463 27.559,25.4 27.051,25.908 27.051,28.435 v1(27.064,28.448)
PORT96: P3.27 U1.96 U2.1 | length 36.1
  Top Layer w0.3: U2.1 27.864,28.626 28.15,28.912 U1.96
  Bottom Layer w0.3: P3.27 22.86,15.621 28.194,20.955 v1(28.194,27.051)
PORT97: U1.97 U2.35 | length 25
  Top Layer w0.3: U2.35 20.664,17.108 29.21,25.654 29.21,31.496 28.65,32.056 U1.97
PORT98: U1.98 U2.36 | length 25
  Top Layer w0.3: U2.36 21.464,16.765 29.845,25.146 29.845,32.766 29.15,33.461 U1.98
PORT101: U1.101 U2.37 | length 24.7
  Top Layer w0.3: U2.37 22.264,16.549 30.65,24.935 U1.101
PORT102: U1.102 U2.38 | length 24.6
  Top Layer w0.3: U2.38 23.064,16.206 31.15,24.292 U1.102
PORT103: P3.11 U1.103 U2.41 | length 39.5
  Top Layer w0.3: v1(24.13,12.065) 24.384,12.065 25.464,13.145 25.464,17.463 31.65,23.649 U1.103
  Bottom Layer w0.3: v1(24.13,12.065) 24.13,1.27 P3.11
PORT104: P3.28 U1.104 U2.42 | length 36
  Top Layer w0.3: v1(25.781,12.192) 26.264,12.675 26.264,17.12 32.15,23.006 U1.104
  Bottom Layer w0.3: P3.28@25.273,2.54 25.273,11.684 v1(25.781,12.192)
PORT105: P3.12 U1.105 U2.43 | length 41
  Top Layer w0.3: U2.43 27.064,15.888 32.65,21.474 U1.105
  Bottom Layer w0.3: v1(27.559,16.51) 27.559,15.621 26.67,14.732 26.67,1.27 P3.12
PORT106: P3.29 U1.106 U2.44 | length 37.7
  Top Layer w0.3: U2.44 27.864,15.037 33.15,20.323 U1.106
  Bottom Layer w0.3: P3.29@27.813,2.54 27.813,14.605 29.083,15.875 v1(29.083,16.256)
PORT107: P3.13 U1.107 U2.32 | length 52.8
  Top Layer w0.3: U2.32@18.288,14.416 18.288,12.954 20.193,11.049 26.162,11.049 33.65,18.537 U1.107
  Bottom Layer w0.3: v1(29.464,14.351) 29.21,14.097 29.21,1.27 P3.13
PORT108: P3.30 U1.108 U2.31 | length 52.6
  Top Layer w0.3: U2.31 17.464,12.254 19.431,10.287 26.924,10.287 34.15,17.513 U1.108
  Bottom Layer w0.3: P3.30 30.48,13.97 v1(30.734,14.224)
PORT109: P3.14 U1.109 U2.30 | length 62.7
  Top Layer w0.3: U2.30 16.664,11.784 18.923,9.525 27.432,9.525 37.846,19.939 37.846,36.322 36.69,37.478 U1.109
  Bottom Layer w0.3: v1(32.131,14.224) 31.75,13.843 31.75,1.27 P3.14
PORT110: P3.31 U1.110 U2.29 | length 63.7
  Top Layer w0.3: U2.29 15.864,11.441 18.542,8.763 28.067,8.763 38.608,19.304 38.608,36.703 37.333,37.978 U1.110
  Bottom Layer w0.3: P3.31 33.02,13.843 33.401,14.224 v1(33.528,14.224)
PORT111: P3.15 U1.111 U2.28 | length 70.8
  Top Layer w0.3: U2.28 15.064,11.098 18.161,8.001 28.702,8.001 39.497,18.796 39.497,36.83 37.849,38.478 U1.111
  Bottom Layer w0.3: v1(35.052,14.224) 34.29,13.462 34.29,1.27 P3.15
PORT112: P3.32 U1.112 U2.27 | length 71.7
  Top Layer w0.3: U2.27 14.264,10.755 17.653,7.366 29.718,7.366 40.132,17.78 40.132,37.084 38.238,38.978 U1.112
  Bottom Layer w0.3: P3.32 35.56,13.335 36.449,14.224 v1(36.576,14.224)
PORT113: P5.20 U1.113 U2.26 | length 79.3
  Top Layer w0.3: U2.26 13.464,10.285 17.018,6.731 30.607,6.731 v1(40.894,17.018) 40.894,37.084 38.5,39.478 U1.113
  Bottom Layer w0.3: v1@40.831,17.081 49.276,25.527 P5.20@53.34,25.527
PORT114: P5.3 U1.114 U2.25 | length 86.4
  Top Layer w0.3: U2.25 12.664,9.815 16.51,5.969 31.369,5.969 41.91,16.51 41.91,37.084 39.016,39.978 U1.114
  Bottom Layer w0.3: v1@41.084,15.684 49.53,24.13 54.61,24.13 P5.3
  other v1: 41.021,15.748
PORT117: P5.19 U1.117 U2.24 | length 85.7
  Top Layer w0.3: U2.24 11.864,9.091 15.621,5.334 32.258,5.334 42.799,15.875 42.799,37.211 38.532,41.478 U1.117
  Bottom Layer w0.3: v1(42.672,15.748) 49.784,22.86 P5.19
PORT118: P5.2 U1.118 U2.23 | length 92.9
  Top Layer w0.3: U2.23 11.064,8.113 14.478,4.699 33.02,4.699 43.561,15.24 43.561,37.338 38.921,41.978 U1.118
  Bottom Layer w0.3: v1(42.672,14.351) 49.911,21.59 54.61,21.59 P5.2
PORT119: P5.4 U1.119 | length 31.9
  Top Layer w0.3: U1.119 39.31,42.478 44.323,37.465 44.323,28.956 46.482,26.797 54.737,26.797 P5.4
PORT120: P5.21 U1.120 | length 28.2
  Top Layer w0.3: U1.120 39.572,42.978 44.958,37.592 44.958,29.845 46.863,27.94 P5.21
PORT121: P5.5 U1.121 | length 30.6
  Top Layer w0.3: U1.121 40.215,43.478 45.593,38.1 45.593,30.861 47.244,29.21 54.61,29.21 P5.5
PORT122: P5.22 U1.122 | length 26.8
  Top Layer w0.3: U1.122 40.731,43.978 46.355,38.354 46.355,31.75 47.625,30.48 P5.22
PORT123: P5.6 U1.123 | length 29
  Top Layer w0.3: U1.123 41.12,44.478 47.117,38.481 47.117,32.893 48.26,31.75 54.61,31.75 P5.6
PORT124: P5.23 U1.124 | length 25.1
  Top Layer w0.3: U1.124 41.509,44.978 47.879,38.608 47.879,33.909 48.768,33.02 P5.23
PORT125: P5.7 U1.125 | length 26.7
  Top Layer w0.3: U1.125 42.025,45.478 48.641,38.862 48.641,36.195 50.546,34.29 54.61,34.29 P5.7
PORT127: P5.24 U1.127 | length 23
  Top Layer w0.3: U1.127 42.041,46.478 49.276,39.243 49.276,37.465 51.181,35.56 P5.24
PORT129: P5.8 U1.129 | length 25.8
  Top Layer w0.3: U1.129 42.184,47.478 50.038,39.624 50.038,38.1 51.308,36.83 54.61,36.83 P5.8
PORT130: P5.25 U1.130 | length 22.2
  Top Layer w0.3: U1.130 42.827,47.978 50.8,40.005 50.8,38.862 51.562,38.1 P5.25
PORT131: P5.9 U1.131 | length 24.2
  Top Layer w0.3: U1.131 43.343,48.478 52.451,39.37 54.61,39.37 P5.9
PORT132: P5.26 U1.132 | length 20.8
  Top Layer w0.3: U1.132 43.859,48.978 52.197,40.64 P5.26
PORT133: P5.10 U1.133 | length 23.6
  Top Layer w0.3: U1.133 44.375,49.478 51.943,41.91 54.61,41.91 P5.10
PORT134: P5.11 U1.134 | length 22.7
  Top Layer w0.3: U1.134 45.018,49.978 50.546,44.45 54.61,44.45 P5.11
PORT137: P5.28 U1.137 | length 19.8
  Top Layer w0.3: U1.137 44.788,51.478 50.546,45.72 P5.28
PORT138: P5.12 U1.138 | length 22.5
  Top Layer w0.3: U1.138 45.431,51.978 50.419,46.99 54.61,46.99 P5.12
PORT139: P5.29 U1.139 | length 19.1
  Top Layer w0.3: U1.139 46.201,52.478 50.419,48.26 P5.29
PORT140: P5.13 U1.140 | length 21.9
  Top Layer w0.3: U1.140 47.098,52.978 50.546,49.53 54.61,49.53 P5.13
PORT141: P5.30 U1.141 | length 18.5
  Top Layer w0.3: U1.141 47.741,53.478 50.419,50.8 P5.30
PORT142: P5.14 U1.142 | length 21.2
  Top Layer w0.3: U1.142 48.638,53.978 50.546,52.07 54.61,52.07 P5.14
PORT143: P5.31 U1.143 | length 17.9
  Top Layer w0.3: U1.143 49.662,54.478 50.8,53.34 P5.31
PORT144: P5.15 U1.144 | length 20.6
  Top Layer w0.3: U1.144 50.559,54.978 50.927,54.61 54.61,54.61 P5.15
RESET#: C16.1 R6.1 S1.2 U4.49 | length 48.2
  Top Layer w0.3: v1(-0.254,48.26) -0.254,48.895 0.191,49.34 U4.49
  Top Layer w0.4: S1.2@-32.131,56.896 -25.781,56.896 -26.924,58.039 C16.1 ; R6.1 -27.09,60.11 C16.1 ; v1(-25.019,60.071) -25.146,59.944 C16.1
  Bottom Layer w0.3: v1(-25.019,60.071) -11.811,60.071 -3.175,51.435 -1.905,51.435 -0.254,49.784 v1(-0.254,48.26)
SCL: P4.1 R13.2 U4.22 U5.6 | length 31.1
  Top Layer w0.254: U5.6@-13.716,31.242 -13.716,36.83 -10.096,40.45 U4.22 ; -13.716,35.306 -8.128,29.718 P4.1@-8.128,28.956 ; P4.1 -6.858,28.194 -6.858,26.035 -5.715,24.892 R13.2
SDA: P4.2 P4.4 R14.2 U4.23 | length 22.2
  Top Layer w0.254: U4.23 -9.335,39.814 -11.938,37.211 -11.938,35.306 -6.096,29.464 P4.2 ; P4.4 -5.588,27.178 P4.2 ; R14.2 P4.2
SDA1: P4.3 U5.5 | length 6.8
  Top Layer w0.254: U5.5@-12.573,31.369 -12.573,30.861 P4.3@-8.128,26.416
SLRD: U1.38 U4.8 | length 37.4
  Top Layer w0.3: U4.8 -9.842,49.34 -11.303,50.8 -11.303,55.372 -9.271,57.404 8.509,57.404 11.435,54.478 U1.38
SLWR: U1.37 U4.9 | length 40
  Top Layer w0.3: U4.9 -10.096,48.704 -12.065,50.673 -12.065,55.753 -9.652,58.166 8.89,58.166 12.078,54.978 U1.37
USB5V: C12.1 C14.1 P1.1 R7.2 U3.3 USB1.1 | length 47.7
  Top Layer w0.7: C12.1@-21.971,31.75 -20.79,31.75 -18.796,33.744 USB1.1 ; -21.844,28.702 -21.717,28.575 v1(-19.177,28.575) ; C12.1 -21.844,28.321 U3.3@-21.59,28.067 ; P1.1@-19.812,8.255 -10.353,8.255 R7.2
  Bottom Layer w0.7: P1.1@-19.812,8.001 -19.812,27.94 v1(-19.177,28.575)
  other v1: -19.431,33.274
USB+: U4.15 USB1.3 | length 14.8
  Top Layer w0.254: USB1.3 -19.621,44.895 U4.15
USB-: U4.16 USB1.2 | length 12
  Top Layer w0.254: USB1.2 -17.716,44.259 U4.16
VCC3.3: C1.2 C2.2 C3.2 C11.1 C13.1 C23.2 C24.2 C25.2 C26.2 C27.2 D1.2 D2.2 L1.1 P2.1 P2.18 P3.17 P3.34 P5.17 P5.34 P6.4 R5.2 R6.2 R8.2 R10.2 R12.2 R13.1 R14.1 R16.2 R17.2 R18.2 U1.9 U1.19 U1.25 U1.46 U1.56 U1.64 U1.82 U1.90 U1.100 U1.116 U1.126 U1.136 U2.11 U2.33 U3.2 U3.4 U4.6 U4.18 U4.24 U4.34 U4.39 U4.50 U5.8 U6.4 | length 459.9
  Top Layer w0.2: U1.64 v1@18.542,41.478 ; U1.46 18.542,50.478 ; U1.56@14.862,45.466 U1.56 18.542,45.478 ; U2.33 19.064,17.667 19.812,18.415 v1(19.939,18.415) ; v1(19.812,28.321) 19.864,28.269 U2.11 ; U1.82 21.15,39.497 ; 22.098,52.705 22.15,52.757 U1.25 ; v1@25.146,39.497 25.146,38.989 25.15,38.985 U1.90 ; v1@25.146,52.959 25.146,53.34 25.15,53.344 U1.19 ; U1.100 30.15,39.497 ; 30.15,52.781 U1.9 ; 31.834,40.978 U1.116 ; 32.004,45.978 U1.126 ; 32.004,50.978 U1.136
  Top Layer w0.3: -30.861,65.024 -20.066,65.024 -19.939,64.897 ; P6.4 -30.099,69.596 -30.861,68.834 -30.861,64.555 R6.2 ; U4.24 -2.603,39.179 ; U4.18 U4.39 ; U4.6 -2.603,50.609 ; -2.603,49.974 U4.50 ; -2.476,39.814 U4.34
  Top Layer w0.4: -18.288,25.087 -18.288,27.432 -16.256,29.464 U5.8 ; D2.2 -7.62,59.436 -2.286,59.436 0.762,62.484 R5.2 ; D1.2 -7.366,69.342 -6.858,69.342 -4.572,71.628 v1(0.889,71.628)
  Top Layer w0.6: D2.2 D1.2 ; v3(-2.603,38.163) v3(-2.603,52.642) ; 18.542,50.478 18.542,40.005 19.05,39.497 30.353,39.497 32.004,41.148 32.004,51.435 30.734,52.705 22.098,52.705
  Top Layer w0.7: C11.1 -25.234,18.122 -27.357,20.245 U3.4 U3.2 -21.03,25.781 -19.05,25.781 -17.907,24.638 -17.907,21.082 -16.256,19.431 -3.937,19.431 -0.635,22.733 v6@-0.635,30.734 ; R17.2 -19.978,67.271 ; v3(-19.939,61.468) -19.939,67.232 -19.978,67.271 ; -19.939,62.611 -17.311,62.611 R12.2 ; R10.2 -19.773,67.476 -19.978,67.271
  Bottom Layer w0.2: v1(19.939,18.415) v1@19.939,28.448
  Bottom Layer w0.4: P2.18 0,72.517 v1(0.889,71.628) ; v1(1.524,62.484) 2.62,63.58 U6.4 ; 10.287,30.988 29.21,30.988 37.973,22.225 37.973,7.493 40.64,4.826 P3.17 ; 17.018,30.988 19.685,28.321 v1(19.812,28.321) ; v1(18.542,41.656) C24.2 ; v1(18.542,47.752) C23.2 ; v1(25.4,39.751) C25.2 ; C1.2 v1(25.4,52.705) ; C3.2 v1(31.75,41.656) ; C2.2 v1(31.75,47.752) ; v1(31.369,52.324) 40.005,60.96 P5.17
  Bottom Layer w0.6: v3@-19.812,61.468 D2.2 -2.603,54.419 v3(-2.603,52.642) ; L1.1 -1.778,48.299 v1(-1.778,49.784) ; v6(-0.635,30.988) 10.287,30.988 v5(18.796,39.497)
  Bottom Layer w0.7: v3(-2.603,38.163) -0.635,36.195 v6(-0.635,30.988)
  other v1: -31.623,22.86 -29.083,22.987 -31.623,27.94 -28.956,27.94
WAKEUP: C15.1 R5.1 U4.51 | length 17.2
  Top Layer w0.4: U4.51 4.635,50.609 v1(5.207,50.038) ; C15.1@5.207,59.817 5.207,62.269 R5.1
  Bottom Layer w0.4: v1(5.207,50.038) v1(5.207,61.214)
pads on no net: P6.6 P6.7 P6.8 U5.7 U6.1
copper on no net:
  other v4: 50.927,5.08 50.927,73.66

## Polygon pours and split planes (outlines as drawn)
DGND on Top Layer "Bottom Layer-No Net" (solid, remove dead copper, pour order 1000): -33.782,81.407 -33.655,81.28 57.277,81.28 57.277,-1.778 -33.782,-1.778 -33.782,81.407
DGND on Bottom Layer "Bottom Layer-No Net" (solid, remove dead copper, pour order 1001): -33.782,81.407 57.404,81.407 57.404,-1.905 -33.655,-1.905 -33.782,-1.778 -33.782,81.407

## Keep-outs
Keep-Out Layer:
  lines w0.254: -33.655,77.216 cw(c-29.909,77.534) -29.466,81.267 ; -33.655,77.724 -33.655,2.413 ccw(c-29.464,2.413) -29.464,-1.778 52.578,-1.778 ; -29.453,81.28 53.086,81.28 ; 51.943,-1.778 ccw(c52.324,3.175) 57.277,2.794 ; 52.832,81.28 cw(c52.895,76.898) 57.277,76.962 ; 57.277,2.54 57.277,77.343

## Other copper
Top Layer:
  rectangle net VCC3.3: -33.02,21.082 -25.019,28.956
Bottom Layer:
  rectangle net VCC3.3: -33.02,21.082 -24.892,28.956
  rectangle net DGND: 29.464,17.272 31.75,20.574
  rectangle net DGND: 28.702,17.399 32.131,20.066

## Silkscreen, mask and mechanical layers (free items; w line width, h text height)
Top Overlay:
  circle w0.254: c50.927,5.08 r4.379
  circle w0.254: c50.927,73.66 r4.522
  circle w0.254: c53.721,12.954 r2.163
  rectangle: -17.399,10.922 -3.937,14.732
  lines w0.254: -1.27,3.81 -1.27,10.668 -1.27,11.684 41.91,11.684 41.91,3.81 ; -1.27,8.001 41.91,8.001 ; -1.27,71.501 41.91,71.501 ; -1.27,74.93 -1.27,67.691 42.037,67.691 41.91,67.818 41.91,74.93 ; 1.016,-1.27 1.016,3.81 1.016,11.557 1.143,11.684 ; 1.143,67.691 1.143,80.01 ; 3.81,-1.27 3.81,3.81 3.81,11.684 ; 3.81,67.691 3.81,79.883 3.937,80.01 ; 6.223,11.684 6.35,11.557 6.35,3.81 6.35,-1.143 ; 6.35,67.818 6.35,80.01 ; 8.763,-1.27 8.763,4.064 ; 8.763,3.81 8.763,11.684 ; 8.89,67.691 8.89,80.01 ; 11.176,-1.27 11.176,3.81 11.176,11.684 ; 11.303,67.691 11.43,67.818 11.43,80.01 ; 13.589,-1.27 13.589,3.683 13.716,3.81 ; 13.589,3.937 13.589,11.684 ; 13.97,67.691 13.97,80.01 ; 16.256,-1.27 16.256,3.81 16.256,11.684 ; 16.383,67.691 16.383,79.883 16.51,80.01 ; 18.923,11.684 19.05,11.557 19.05,3.81 19.05,-1.27 ; 18.923,67.691 19.05,67.818 19.05,80.01 ; 21.59,-1.27 21.59,3.81 21.59,11.684 ; 21.59,67.691 21.59,80.01 ; 24.13,-1.27 24.13,3.81 24.13,11.684 ; 24.13,67.691 24.13,80.01 ; 26.416,11.684 26.543,11.557 26.543,3.81 26.543,-1.27 ; 26.67,67.691 26.67,80.01 ; 29.083,-1.27 29.083,3.81 29.083,11.684 ; 29.21,80.01 29.337,79.883 29.337,67.691 ; 31.496,-1.27 31.496,3.81 31.496,11.684 ; 31.75,80.01 31.877,79.883 31.877,67.691 ; 34.036,11.684 34.163,11.557 34.163,3.81 34.163,-1.27 ; 34.29,67.691 34.29,80.01 ; 36.703,11.684 36.703,3.81 36.703,-1.143 36.83,-1.27 ; 36.83,67.691 36.83,80.01 ; 39.37,-1.27 39.37,3.81 39.37,11.684 ; 39.37,67.691 39.37,80.01 ; 43.434,21.59 57.023,21.59 ; 43.434,24.13 43.688,24.13 57.15,24.13 ; 43.434,26.924 57.15,26.924 ; 43.434,29.464 57.15,29.464 ; 43.434,32.004 57.15,32.004 ; 43.434,34.544 57.15,34.544 ; 43.434,36.957 57.15,36.957 ; 43.434,39.624 57.15,39.624 ; 43.434,42.164 43.561,42.037 57.15,42.037 ; 43.434,44.704 57.15,44.704 ; 43.434,46.99 43.561,46.863 57.15,46.863 ; 43.434,49.657 57.15,49.657 ; 43.434,52.07 57.15,52.07 ; 43.434,54.737 57.15,54.737 ; 43.434,57.023 57.15,57.023 ; 43.434,59.69 57.15,59.69 ; 47.752,19.05 47.752,62.23 ; 52.07,19.05 43.434,19.05 43.434,62.23 52.07,62.23
  text "VCC" at -0.508,74.549 h1 r270
  text "GND" at 2.032,74.549 h1 r270
  text "GND" at 19.812,74.549 h1 r270
  text "GND" at 40.259,74.549 h1 r270
  text "32" at 4.572,74.168 h1 r270
  text "30" at 7.112,74.168 h1 r270
  text "28" at 9.652,74.168 h1 r270
  text "24" at 12.319,74.168 h1 r270
  text "22" at 14.859,74.168 h1 r270
  text "18" at 17.272,74.168 h1 r270
  text "16" at 22.352,74.168 h1 r270
  text "14" at 24.892,74.041 h1 r270
  text "12" at 27.559,74.041 h1 r270
  text "8" at 30.226,73.787 h1 r270
  text "4" at 35.179,73.66 h1 r270
  text "2" at 37.719,73.66 h1 r270
  text "6" at 32.766,73.533 h1 r270
  text "15" at 22.479,70.993 h1 r270
  text "13" at 25.019,70.993 h1 r270
  text "11" at 27.686,70.993 h1 r270
  text "GND" at 40.259,70.993 h1 r270
  text "VCC" at -0.635,70.866 h1 r270
  text "GND" at 2.032,70.866 h1 r270
  text "GND" at 19.812,70.866 h1 r270
  text "7" at 29.972,70.739 h1 r270
  text "27" at 9.525,70.612 h1 r270
  text "23" at 12.319,70.612 h1 r270
  text "5" at 32.639,70.612 h1 r270
  text "29" at 7.366,70.485 h1 r270
  text "21" at 14.986,70.485 h1 r270
  text "20" at 17.272,70.485 h1 r270
  text "3" at 35.179,70.485 h1 r270
  text "31" at 4.572,70.358 h1 r270
  text "1" at 37.719,70.231 h1 r270
  text "28" at -6.35,64.643 h1
  text "VCC" at 44.323,60.579 h1
  text "VCC" at 48.387,60.452 h1
  text "27" at -6.477,58.801 h1
  text "GND" at 48.387,58.166 h1
  text "GND" at 44.196,58.039 h1
  text "GND" at 44.069,55.499 h1
  text "144" at 48.26,55.499 h1
  text "143" at 44.069,52.959 h1
  text "142" at 48.26,52.832 h1
  text "141" at 44.196,50.419 h1
  text "140" at 48.26,50.292 h1
  text "139" at 44.069,47.879 h1
  text "138" at 48.26,47.879 h1
  text "137" at 44.069,45.339 h1
  text "134" at 48.26,45.339 h1
  text "GND" at 44.069,42.799 h1
  text "133" at 48.26,42.799 h1
  text "132" at 44.069,40.513 h1
  text "131" at 48.514,40.386 h1
  text "130" at 44.196,37.846 h1
  text "129" at 48.387,37.719 h1
  text "127" at 44.323,35.179 h1
  text "125" at 48.26,35.179 h1
  text "124" at 44.196,32.766 h1
  text "123" at 48.26,32.639 h1
  text "122" at 44.196,30.099 h1
  text "121" at 48.387,30.099 h1
  text "SCL" at -9.906,28.829 h1 r90
  text "SDA" at -3.048,28.575 h1 r90
  text "120" at 44.196,27.686 h1
  text "119" at 48.387,27.686 h1
  text "SDA" at -3.048,25.146 h1 r90
  text "113" at 44.196,25.019 h1
  text "114" at 48.387,25.019 h1
  text "117" at 44.323,22.352 h1
  text "118" at 48.514,22.352 h1
  text "GND" at 44.323,19.685 h1
  text "GND" at 48.387,19.685 h1
  text "GND" at 48.26,12.573 h1
  text "91" at 18.161,9.271 h1 r90
  text "86" at 12.954,9.144 h1 r90
  text "94" at 20.828,9.144 h1 r90
  text "74" at 0.254,9.017 h1 r90
  text "76" at 2.794,9.017 h1 r90
  text "78" at 5.461,9.017 h1 r90
  text "80" at 8.128,9.017 h1 r90
  text "84" at 10.287,9.017 h1 r90
  text "88" at 15.494,9.017 h1 r90
  text "96" at 23.241,9.017 h1 r90
  text "112" at 35.814,8.763 h1 r90
  text "104" at 25.654,8.636 h1 r90
  text "106" at 28.194,8.636 h1 r90
  text "110" at 33.401,8.636 h1 r90
  text "VCC" at 41.275,8.636 h1 r90
  text "108" at 30.734,8.509 h1 r90
  text "GND" at 38.481,8.509 h1 r90
  text "95" at 23.241,5.207 h1 r90
  text "111" at 35.941,5.207 h1 r90
  text "75" at 2.794,5.08 h1 r90
  text "81" at 10.287,5.08 h1 r90
  text "85" at 13.081,5.08 h1 r90
  text "89" at 18.161,5.08 h1 r90
  text "93" at 20.828,5.08 h1 r90
  text "107" at 30.861,5.08 h1 r90
  text "73" at 0.254,4.953 h1 r90
  text "77" at 5.461,4.953 h1 r90
  text "87" at 15.621,4.953 h1 r90
  text "103" at 25.654,4.953 h1 r90
  text "105" at 28.067,4.953 h1 r90
  text "109" at 33.401,4.953 h1 r90
  text "GND" at 38.481,4.953 h1 r90
  text "VCC" at 41.275,4.953 h1 r90
  text "79" at 8.001,4.826 h1 r90
  text "+5V" at -29.464,0.762 h2
  text "5V Power" at -19.812,0.127 h1

## Text inside footprints (layer, text, board x,y; h text height)
P2: Top Overlay "34" at 42.164,78.232 h1.27; Top Overlay "17" at 42.164,75.692 h1.27; Top Overlay "1" at -2.54,75.692 h1.27; Top Overlay "18" at -3.556,78.232 h1.27
P3: Top Overlay "18" at -3.556,2.032 h1.27; Top Overlay "1" at -2.54,-0.508 h1.27; Top Overlay "17" at 42.545,-0.508 h1.27; Top Overlay "34" at 42.418,2.032 h1.27
P4: Top Overlay "3" at -8.636,25.4 h1.27 r270; Top Overlay "4" at -6.096,25.4 h1.27 r270; Top Overlay "2" at -5.207,32.131 h1.27 r270; Top Overlay "1" at -9.144,32.131 h1.27 r270
P5: Top Overlay "34" at 53.848,62.484 h1.27 r90; Top Overlay "17" at 56.388,62.484 h1.27 r90; Top Overlay "1" at 56.388,17.78 h1.27 r90; Top Overlay "18" at 53.848,16.764 h1.27 r90
P6: Top Overlay "10" at -28.448,78.74 h1.27 r90; Top Overlay "9" at -25.908,78.74 h1.27 r90; Top Overlay "1" at -25.908,65.024 h1.27 r90; Top Overlay "2" at -28.448,64.516 h1.27 r90